# Altium PCB Amplifier Card.PcbDoc
Units mm, origin at the board's own origin, x right, y up, seen from the top; angles counter-clockwise.
Board outline 91 x 34 mm, 2 copper layers (Top Layer, Bottom Layer); 51 components, 24 nets, 125 pads, 0 vias.
Unrouted connection lines stored in the file: 57.
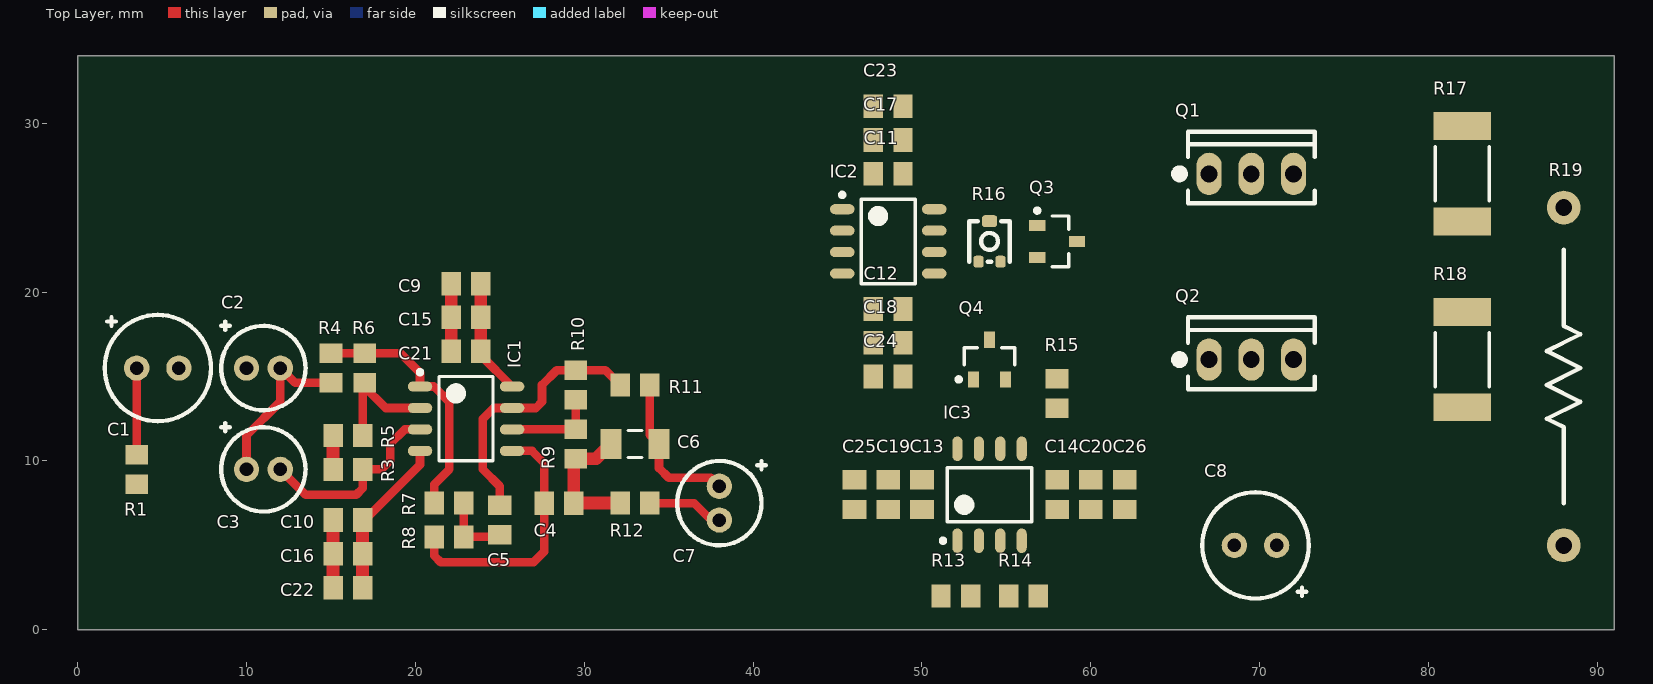
[diagram p0: Top Layer view]
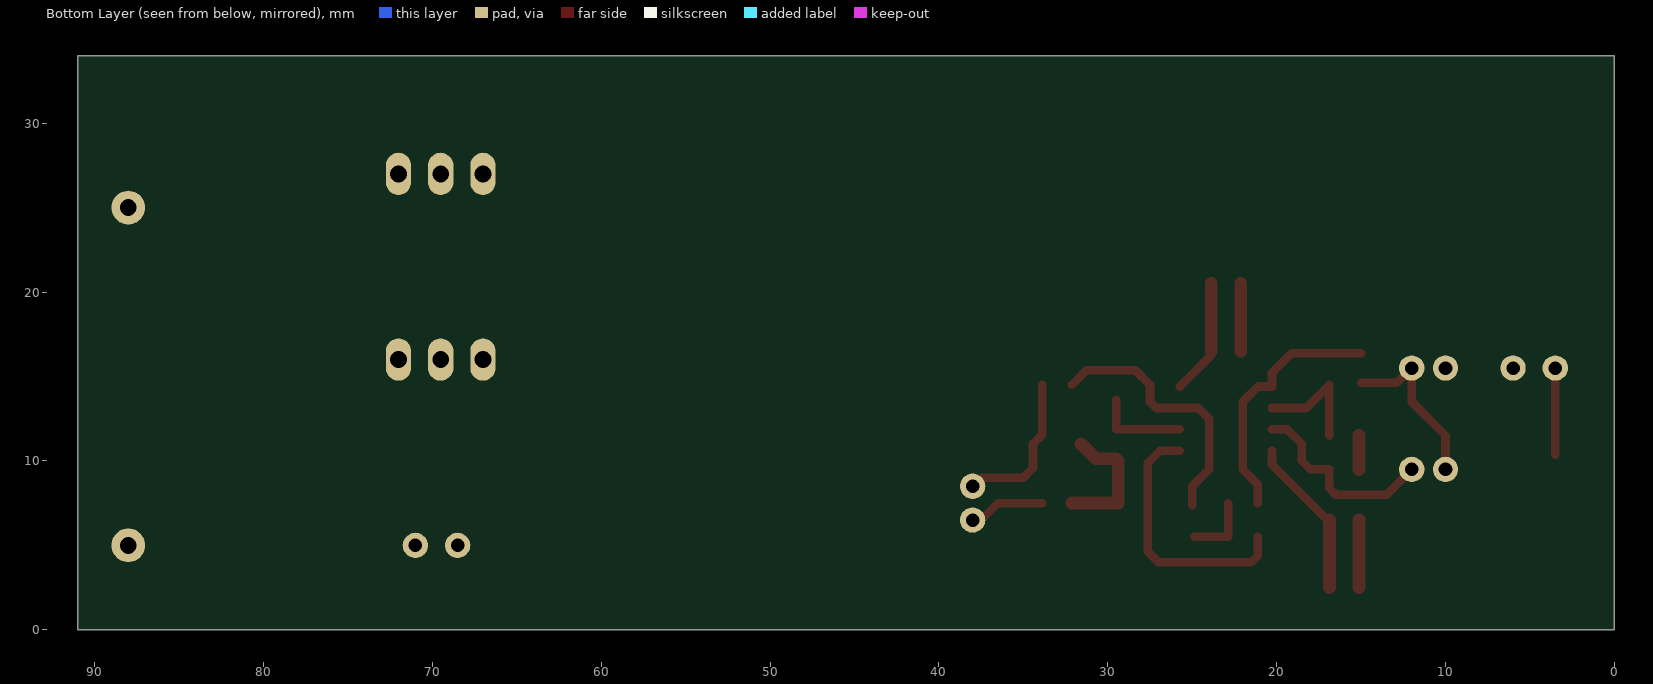
[diagram p1: Bottom Layer view, seen from below]

## Layer stack, top to bottom
Top Solder: solder mask 0.0102, Solder Resist, Dk 3.5
Top Layer: signal copper 0.0356
Dielectric 1: dielectric 0.32, FR-4, Dk 4.8
Bottom Layer: signal copper 0.0356
Bottom Solder: solder mask 0.0102, Solder Resist, Dk 3.5

## Board outline
0,0 0,34 91,34 91,0

## Design rules (kind name [scope] priority, off if disabled: settings)
Clearance [All] p1: gap=0.203
PolygonConnect [All] p1: connectstyle=Relief reliefconductorwidth=0.254 reliefentries=4 polygonreliefangle="90 Angle" airgapwidth=0.254
RoomDefinition Preamplifier [InComponentClass('Preamplifier')] p1: confinementstyle=ConfineIn formatcopy=TRUE lockcomponents=FALSE outline 0,0 42.5,0 42.5,22.5 0,22.5
RoomDefinition "U_Power Amp" [InComponentClass('U_Power Amp')] p2: confinementstyle=ConfineIn formatcopy=TRUE lockcomponents=FALSE outline 43,0 91,0 91,34 43,34
RoutingVias [All] p1: holewidth=0.711 width=1.27 viastyle="Through Hole" minholewidth=0.711 minwidth=1.27 maxholewidth=0.711 maxwidth=1.27
SolderMaskExpansion [All] p1: expansion=0.102
Width [All] p1: maxlimit=2.54 minlimit=0.254 preferedwidth=0.508
30 further rules are at their usual default settings.

## Classes and differential pairs
component class "U_Power Amp": C8 C11 C12 C13 C14 C17 C18 C19 C20 C23 C24 C25 C26 IC2 IC3 Q1 Q2 Q3 Q4 R13 R14 R15 R16 R17 R18 R19
component class Preamplifier: C1 C2 C3 C4 C5 C6 C7 C9 C10 C15 C16 C21 C22 IC1 R1 R3 R4 R5 R6 R7 R8 R9 R10 R11 R12

## Components (designator, comment, footprint, x,y, rotation, side; value= is the part's Value field where it differs from the comment)
C1 "68u" CRADIAL-2.5mm 3.5,15.5 r0 top
C2 "4.7u" CRADIAL-2mm 10,15.5 r0 top
C3 "2.2u" CRADIAL-2mm 10,9.5 r0 top
C4 "4.7n" C0805 28.5,7.5 r180 top
C5 "2.2n" C0805 25,6.5 r270 top
C6 "47n" C1206 33,11 r0 top
C7 "4.7u" CRADIAL-2mm 38,8.5 r270 top
C8 "68u" CRADIAL-2.5mm 71,5 r180 top
C9 "100p" C0805 23,16.5 r0 top
C10 "100p" C0805 16,6.5 r180 top
C11 "100p" C0805 48,27 r0 top
C12 "100p" C0805 48,19 r0 top
C13 "100p" C0805 50,8 r90 top
C14 "100p" C0805 58,8 r90 top
C15 "10n" C0805 23,18.5 r0 top
C16 "10n" C0805 16,4.5 r180 top
C17 "10n" C0805 48,29 r0 top
C18 "10n" C0805 48,17 r0 top
C19 "10n" C0805 48,8 r90 top
C20 "10n" C0805 60,8 r90 top
C21 "1u" C0805 23,20.5 r0 top
C22 "1u" C0805 16,2.5 r180 top
C23 "1u" C0805 48,31 r0 top
C24 "1u" C0805 48,15 r0 top
C25 "1u" C0805 46,8 r270 top
C26 "1u" C0805 62,8 r90 top
IC1 "TL082" SOIC127P600X175-8N 23,12.5 r0 top
IC2 "LF356" SOIC127P600X175-8N 48,23 r0 top
IC3 "TL081" SOIC127P600X175-8N 54,8 r90 top
Q1 "TIP120" TO-220 67,27 r0 top
Q2 "TIP125" TO-220 67,16 r0 top
Q3 "MMBT3904-7-F" SOT95P240X110-3N 58,23 r0 top
Q4 "MMBT3904-7-F" SOT95P240X110-3N 54,16 r90 top
R1 "1M" R0805 3.5,9.5 r90 top
R3 "1.3K" R0805 16,9.5 r0 top
R4 "2.7K" R0805 15,15.5 r270 top
R5 "1K" R0805 16,11.5 r180 top
R6 "2K" R0805 17,15.5 r270 top
R7 "1.3K" R0805 22,7.5 r0 top
R8 "2.7K" R0805 22,5.5 r180 top
R9 "1.3K" R0805 29.5,11 r90 top
R10 "3.9K" R0805 29.5,14.5 r90 top
R11 "100" R0805 33,14.5 r180 top
R12 "100K" R0805 33,7.5 r180 top
R13 "20K" R0805 52,2 r180 top
R14 "330" R0805 56,2 r180 top
R15 "100" R0805 58,14 r90 top
R16 "10K" "Res Pot Square Trimm" 54,23 r0 top
R17 "0.05" R2512 82,27 r90 top
R18 "0.05" R2512 82,16 r90 top
R19 "3.9" RAXIAL-20mm-1mm 88,5 r90 top

## Footprints (in the part's own frame and the unit in brackets; to place one, negate y for a bottom-side part, rotate by r counter-clockwise, add the part's x,y. Pads: shape width x height; smd on the part's side, far side on the other; paste and mask are expansions set on the pad)
C0805 [mm] "Chip Capacitor, 2-Leads, Body 2,00x1,25mm, IPC Medium Density"
  rect 1.15x1.4 smd: 1(-0.875,0) 2(0.875,0)
  body extent -1.1,-0.67 1.1,0.67, height 0.7
C1206 [mm] "Chip Capacitor, 2-Leads, Body 3,20x1,60mm, IPC Medium Density"
  rect 1.25x1.8 smd: 1(-1.425,0) 2(1.425,0)
  silkscreen extent -0.4,-0.8 0.4,0.8, body extent -1.7,-0.9 1.7,0.9, height 0.7
CRADIAL-2.5mm [mm]
  round 1.5 hole 0.8: 1(0,0) 2(2.5,0)
  silkscreen extent -1.9,-3.15 4.4,3.15
CRADIAL-2mm [mm]
  round 1.5 hole 0.8: 1(0,0) 2(2,0)
  silkscreen extent -1.5,-2.5 3.5,2.75
R0805 [mm] "Chip Resistor, 2-Leads, Body 2,00x1,25mm, IPC Medium Density"
  rect 1.15x1.35 smd: 1(-0.875,0) 2(0.875,0)
  body extent -1.1,-0.67 1.1,0.67, height 0.7
R2512 [mm] "Chip Resistor, 2-Leads, Body 6,40x3,20mm, IPC Medium Density"
  rect 1.65x3.4 smd: 1(-2.825,0) 2(2.825,0)
  silkscreen extent -1.6,-1.6 1.6,1.6, body extent -3.3,-1.7 3.3,1.7, height 0.9
RAXIAL-20mm-1mm [mm] "Axial 3W resistor"
  round 2 hole 1: 1(0,0) 2(20,0)
  silkscreen extent 2.5,-1 17.5,1
"Res Pot Square Trimm" [mm]
  rrect50% 0.6x0.7 smd: 1(-0.65,-1.2) 3(0.65,-1.2)
  rrect50% 0.9x0.7 smd: 2(0,1.2)
  silkscreen extent -1.2,-1.2 1.2,1.2
SOIC127P600X175-8N [mm] "SOIC, 8-Leads, Body 4,90x3,90mm, Pitch 1,27mm, IPC Medium Density"
  oval 1.45x0.6 smd: 1(-2.725,1.905) 2(-2.725,0.635) 3(-2.725,-0.635) 4(-2.725,-1.905) 5(2.725,-1.905) 6(2.725,-0.635) 7(2.725,0.635) 8(2.725,1.905)
  silkscreen extent -2.85,-2.5 1.6,2.88, body extent -2,-2.5 2,2.5, height 1.75
SOT95P240X110-3N [mm] "SOT23, 3-Leads, Body 2,90x2,40mm, Pitch 0,95mm, IPC Medium Density"
  rect 0.95x0.65 smd: 1(-1.175,0.95) 2(-1.175,-0.95) 3(1.175,0)
  silkscreen extent -1.3,-1.5 0.7,1.95, body extent -0.7,-1.5 0.7,1.5, height 1.1
TO-220 [mm]
  oval 1.5x2.5 hole 1: 1(0,0) 2(2.5,0) 3(5,0)
  silkscreen extent -2,-1.75 6.25,2.5

## Part data
C1 C2 C3 C7 C8: library part "Pol Capacitor", "Polarized Capacitor"
C4 C5 C6 C9 C10 C11 C12 C13 C14 C15 C16 C17 C18 C19 C20 C21 C22 C23 C24 C25 C26: library part Capacitor, "Capacitor"
Q1: library part TIP120/121/122, "NPN Darlington Bipolar Transistor"
Q2: library part TIP125/126/127, "PNP Darlington Bipolar Transistor"
Q3 Q4: "NPN General Purpose Amplifier SMD"
R1 R3 R4 R5 R6 R7 R8 R9 R10 R11 R12 R13 R14 R15 R17 R18 R19: library part Resistor, "Resistor"
R16: library part "Res Pot", "Square Trimming Potentiometer"

## Nets (pads, with @x,y where several pads share a name; then routed paths per layer and width w, separated by ;. In a path a pad name is that pad's centre, name@x,y a point inside that pad or via, vN(x,y) a via of type N, cw(c..) or ccw(c..) an arc to the next point about the centre after c; other vN are vias at no path point)
-VCC: C10.1 C12.1 C14.1 C16.1 C18.1 C20.1 C22.1 C24.1 C26.1 IC1.4 IC2.4 IC3.4 Q2.2 | length 9.6
  Top Layer w0.508: C10.1 17,6.5 20.275,9.775 IC1.4
  Top Layer w0.762: C22.1 C16.1 C10.1
GND: C4.1 C6.1 C8.2 C9.1 C10.2 C11.1 C12.2 C13.1 C14.2 C15.1 C16.2 C17.1 C18.2 C19.1 C20.2 C21.1 C22.2 C23.1 C24.2 C25.1 C26.2 R1.1 R3.1 R5.2 R9.1 R12.2 R14.1 R15.1 | length 17.7
  Top Layer w0.762: C22.2 C16.2 C10.2 ; R3.1 R5.2 ; C9.1 C15.1 C21.1 ; R9.1@29.375,10 C4.1 R12.2 ; R9.1 30.7,10.125 C6.1
NetC1_1: C1.1 R1.2 | length 5.1
  Top Layer w0.508: R1.2 C1.1
NetC2_2: C2.2 C3.1 R4.2 | length 10.2
  Top Layer w0.508: C3.1 10,11.5 12,13.5 C2.2 12.875,14.625 R4.2
NetC3_2: C3.2 IC1.3 R3.2 | length 11.7
  Top Layer w0.508: C3.2 13.5,8 16.5,8 16.875,8.375 R3.2 18,9.5 18.5,10 18.5,11 19.365,11.865 IC1.3
NetC4_2: C4.2 IC1.5 R8.2 | length 15.5
  Top Layer w0.508: R8.2 21.125,4.375 21.5,4 27,4 27.625,4.625 C4.2 27.625,9.875 26.905,10.595 IC1.5
NetC5_1: C5.1 IC1.7 R10.2 R11.2 | length 15.8
  Top Layer w0.508: C5.1 25,8.5 24,9.5 24,12.5 24.635,13.135 IC1.7 27.135,13.135 27.5,13.5 27.5,14.5 28.375,15.375 R10.2 31.25,15.375 R11.2
NetC5_2: C5.2 R7.2 R8.1 | length 4
  Top Layer w0.508: R7.2 R8.1 C5.2@24.875,5.5
NetC6_2: C6.2 C7.1 R11.1 | length 9.2
  Top Layer w0.508: R11.1 33.875,11.55 C6.2 34.425,9.575 35,9 37.5,9 C7.1
NetC7_2: C7.2 IC2.3 R12.1 | length 4
  Top Layer w0.508: R12.1 36.5,7.5 C7.2@37.5,6.5
NetC8_1: C8.1 R19.1
NetIC1_1: IC1.1 R4.1 R6.1 R7.1 | length 15
  Top Layer w0.508: R4.1 R6.1 19.125,16.375 20.275,15.225 IC1.1 21.095,14.405 22,13.5 22,9.5 21.125,8.625 R7.1
NetIC1_2: IC1.2 R5.1 R6.2 | length 7
  Top Layer w0.508: R5.1 16.875,14.5 18.24,13.135 IC1.2
NetIC1_6: IC1.6 R9.2 R10.1 | length 5.5
  Top Layer w0.508: IC1.6 25.735,11.875 R9.2 R10.1
NetIC2_2: IC2.2 R17.1 R18.2 R19.2
NetIC2_6: IC2.6 Q1.1 Q3.3 R16.1
NetIC3_2: IC3.2 Q4.2 R15.2
NetIC3_3: IC3.3 R13.1 R14.2
NetIC3_6: IC3.6 Q4.1
NetQ1_3: Q1.3 R17.2
NetQ2_1: Q2.1 Q3.2 Q4.3 R16.3
NetQ2_3: Q2.3 R18.1
NetQ3_1: Q3.1 R16.2
VCC: C9.2 C11.2 C13.2 C15.2 C17.2 C19.2 C21.2 C23.2 C25.2 IC1.8 IC2.7 IC3.7 Q1.2 R13.2 | length 6.9
  Top Layer w0.508: C9.2 23.875,16.255 IC1.8
  Top Layer w0.762: C9.2 C15.2 C21.2
pads on no net: C1.2 C2.1 IC2.1 IC2.5 IC2.8 IC3.1 IC3.5 IC3.8

## Silkscreen, mask and mechanical layers (free items; w line width, h text height)
Mechanical 1:
  the board outline again, w0.254